# Altium PCB PCB1.PcbDoc (part 2 of 4)
Units mil, origin at the board's own origin, x right, y up, seen from the top; angles counter-clockwise.
Board outline 3912 x 3804 mil, 4 copper layers (Top Layer, Layer 2, Layer 3, Bottom Layer), stack 23.756 mil thick; 248 components, 329 nets, 1182 pads, 457 vias.
Unrouted connection lines stored in the file: 4.
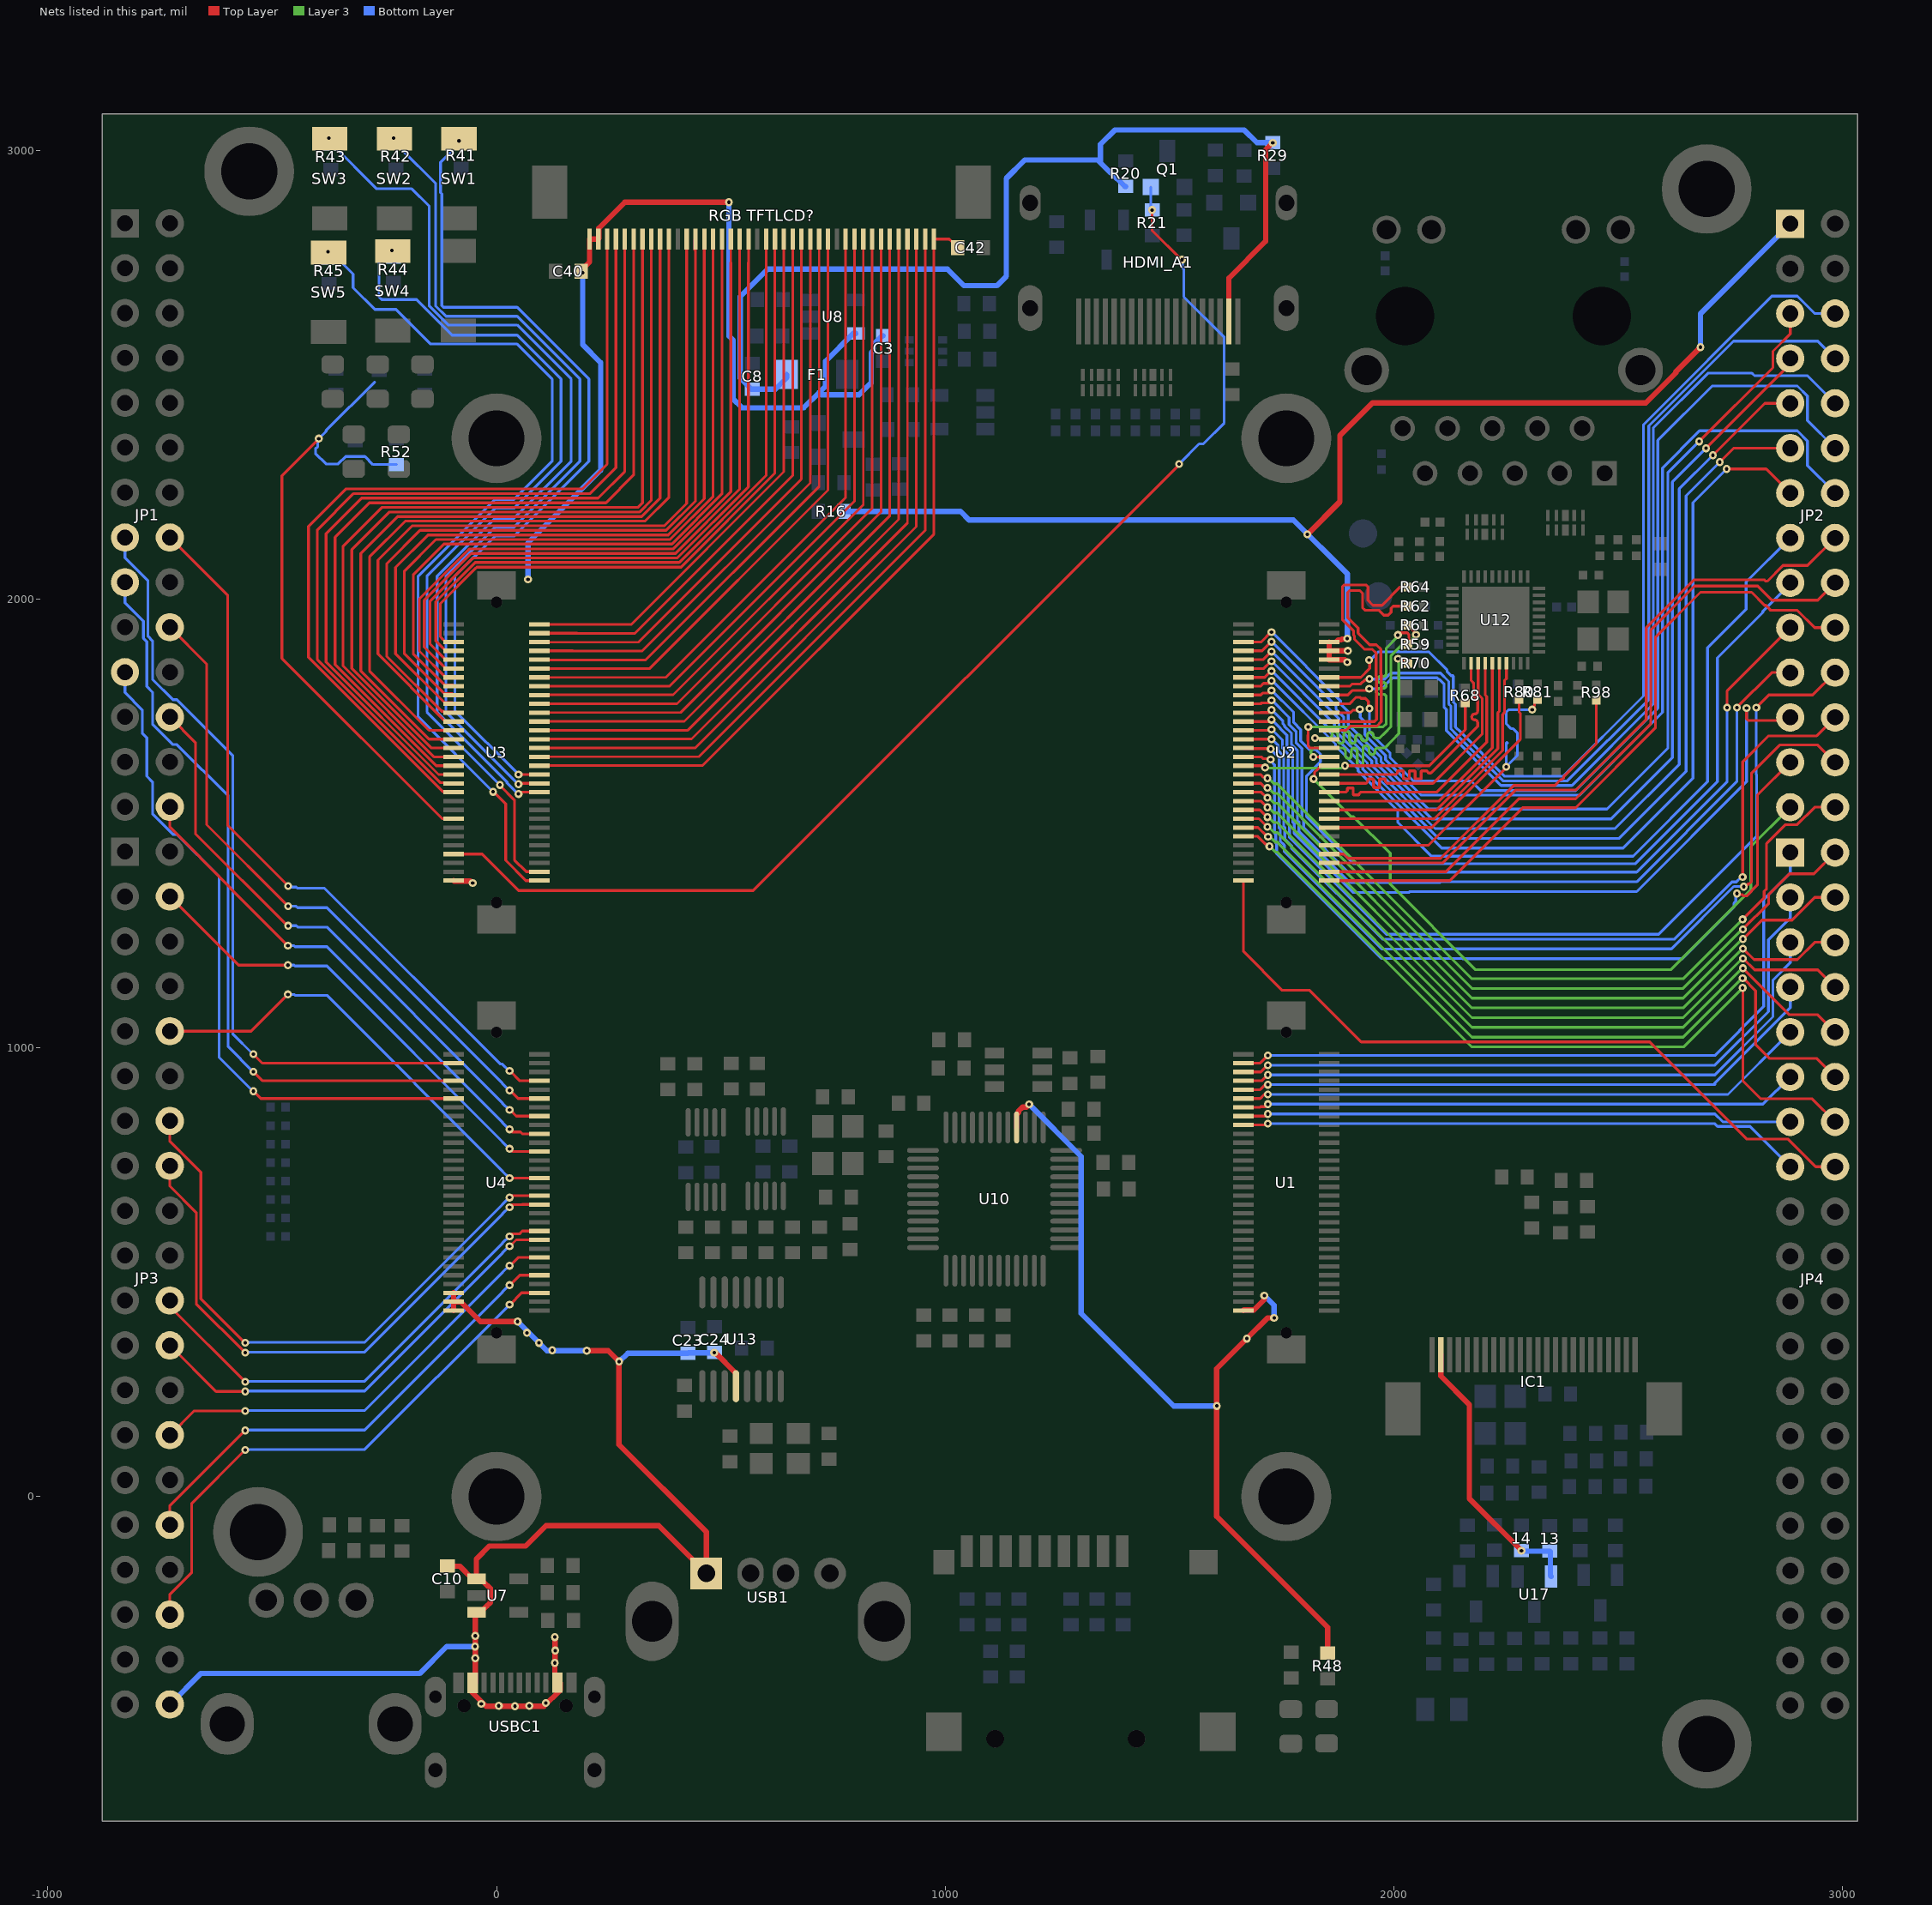
[diagram p4: the nets of this part, all layers, seen from the top]

## Via types
v1: diameter 17.7, hole 7.9, Top Layer to Bottom Layer, tented both sides, 445 vias
v2: diameter 17.7, hole 7.9, Top Layer to Bottom Layer, 12 vias

## Nets (pads, with @x,y where several pads share a name; then routed paths per layer and width w, separated by ;. In a path a pad name is that pad's centre, name@x,y a point inside that pad or via, vN(x,y) a via of type N, cw(c..) or ccw(c..) an arc to the next point about the centre after c; other vN are vias at no path point) (continued)
+5: "RGB TFTLCD?.1" "RGB TFTLCD?.2" C3.2 C10.2 C23.2 C24.2 C40.2 JP2.1 JP3.40 R16.2 R48.2 U1.1 U2.52 U2.54 U2.56 U3.1 U4.1 U4.3 U4.5 U7.1 U7.3 U8.5 U10.40 U13.12 USB1.1 USBC1.A4 USBC1.A9 USBC1.B4 USBC1.B9 | length 10707.7
  Top Layer w12: C10.2@-109.31,-154.78 -108.97,-155.11 -81.6,-155.11 -53.65,-183.06 U7.1@-44.8,-183.06 ; U4.1@-95.47,414.56 U4.3@-95.47,434.24 ; U4.5@-95.47,453.93 U4.3@-95.47,434.24 ; U3.1@-95.47,1372.56 -94.39,1371.48 -58.48,1371.48 -54,1367 v1(-53,1367) ; USBC1.A4@-59.18,-414.92 -59.18,-431.46 -23.64,-467 105.9,-467 141.6,-431.3 USBC1.A9@141.6,-414.76 ; USBC1.B9@-47.37,-414.92 v1(-47.37,-360) v1(-47.37,-310.22) -47.37,-260.44 U7.3@-44.8,-257.87 -35.94,-257.87 -21.64,-243.57 -21.28,-243.57 -14.13,-236.42 -14.13,-204.51 -19.98,-198.65 -20.35,-198.65 -35.94,-183.06 U7.1@-44.8,-183.06 ; v1(47,390) -35.67,390 -79.91,434.24 U4.3@-95.47,434.24 ; USBC1.B4@129.79,-414.76 v1(129.79,-370.48) 130.4,-369.88 130.4,-343.6 v1(131,-343) 130.5,-342.5 130.5,-313.5 v1(130,-313) ; v1(192,2726.54) C40.2@188.54,2730 188.54,2731.97 207.13,2750.56 207.13,2802 226.82,2802 227.9,2803.08 227.9,2826.08 285.82,2884 v1(518,2884) ; v1(201,325) 249,325 v1(273,301) 273,116 467.57,-78.57 USB1.1@467.57,-171 361.57,-65 110.06,-65 65.06,-110 -16,-110 -44.8,-138.8 U7.1@-44.8,-183.06 ; v1(485.03,320.96) 487.29,320.96 533.53,274.72 U13.12@533.53,246 ; U10.40@1159.09,822.57 1159.09,851.51 1163.27,855.69 1163.27,858.91 1172.36,868 1181,868 v1(1187,874) ; U1.1@1664.53,414.56 1665.61,415.64 1687.63,415.64 1711,439.01 v1(1711,448) ; v1(1733,398) 1718,398 v1(1672,352) 1605,285 v1(1605,202) 1605,-44 1852,-291 R48.2@1852,-348.91 ; v1(1807,2144) 1879.5,2216.5 1879.5,2364.5 1952,2437 2561.34,2437 2628.09,2503.74 2628.09,2506.09 v1(2683,2561) ; U2.56@1855.47,1904.05 U2.54@1855.47,1884.37 ; U2.56@1872.11,1905.13 1875.79,1908.82 1882.25,1908.82 1884.31,1910.87 1894.87,1910.87 v1(1895.97,1911.97) ; v1(1896,1859) 1890.32,1864.68 U2.52@1855.47,1864.68 U2.54@1855.47,1884.37 ; v1(1897.15,1884.37) U2.54@1855.47,1884.37
  Bottom Layer w12: JP3.40@-728,-463 -659,-394 -171,-394 -111,-334 v1(-48,-334) ; v1(47,390) 112,325 v1(201,325) ; v1(70.18,2043.82) 70,2044 70,2125 232,2287 232,2527 192,2567 v1(192,2726.54) ; v1(273,301) 274.06,301 292.52,319.46 C23.2@426.53,319.46 427.53,320.46 484.53,320.46 v1(485.03,320.96) C24.2@485.53,321.46 ; v1(518,2884) 518,2586 527.14,2576.86 527.14,2445.86 547,2426 684.87,2426 718.94,2460.07 ; R16.2@774.54,2195 1034,2195 1053,2176 1776,2176 1896,2056 v1(1895.97,1911.97) ; U8.5@800.77,2591.6 794.87,2591.6 733,2529.73 733,2474.13 718.94,2460.07 ; C3.2@861.87,2586.54 859.91,2586.54 840.62,2567.26 840.62,2553.84 834.87,2548.09 834.87,2481.86 808.02,2455 724.02,2455 718.94,2460.07 ; v1(1187,874) 1303,758 1303,408 1509,202 v1(1605,202) ; v1(1711,448) 1732.61,426.39 1732.61,398.39 v1(1733,398) ; v1(2683,2561) 2683,2635.93 JP2.1@2883.07,2836
  other v1: 41.13,-467 5,-466 73,-466 -34,-462 110,-460 124,326 94.49,342.51 68,365
+5_hdmi: C8.2 F1.2 HDMI_A1.18 R20.1 R29.1 | length 2369.8
  Top Layer w12: HDMI_A1.18@1632.11,2618 1632.11,2715.11 1714,2797 1714,3000.54 v1(1730,3016.54)
  Bottom Layer w12: F1.2@646.37,2500 646.37,2492.5 621.33,2467.46 567.91,2467.46 543.14,2492.22 543.14,2673.99 604.15,2735 1005,2735 1042,2698 1115,2698 1136,2719 1136,2937 1177,2978 1340,2978 1346,2972 ; R20.1@1402,2919 1400.03,2919 1369.15,2949.88 1368.12,2949.88 1346,2972 ; v1(1730,3016.54) 1694.64,3016.54 1666.18,3045 1378,3045 1346,3013 1346,2978 1346,2972
AF-2.8V_ov: 13.2 14.2 IC1.23 U17.2 | length 634.1
  Top Layer w12: IC1.23@2104.31,316 2104.4,315.91 2104.4,268.6 2168,205 2168,-4.54 v1(2284,-120.54)
  Bottom Layer w12: v1(2284,-120.54) 2283,-121.54 13.2@2347,-121.54 2348.5,-123.04 2348.5,-176.5 U17.2@2350,-178
B14_IO0: JP2.21 U2.39 | length 1793.4
  Top Layer w6.16: U2.39@1664.54,1746.57 1702.95,1746.57 1703.22,1746.85 1721.23,1746.85 v1(1727,1752.62) ; v1(2764.1,1758) 2842.1,1836 JP2.21@2883.07,1836
  Bottom Layer w6.16: v1(1727,1752.62) 1727.83,1752.62 1752.47,1727.98 1752.47,1721.88 1756.1,1718.25 1756.1,1716.16 1771.68,1700.58 1771.68,1675.58 1784.68,1662.58 1784.68,1506.58 1788,1503.26 1788,1482 1902,1368 2103,1368 ; 2103,1369.74 2540.84,1369.74 2764.1,1593 v1(2764.1,1758)
B14_IO25: JP4.16 U2.1 | length 1675.2
  Top Layer w6.16: U2.1@1664.53,1372.56 1664.53,1214.47 1751,1128 1812,1128 1927,1013 2570,1013 2786.58,796.42 2878.58,796.42 2940,735 JP4.16@2983.07,735
B14_N_L3: JP2.19 U2.41 | length 1849.6
  Top Layer w6.16: U2.41@1664.54,1766.26 1702.95,1766.26 1705.24,1768.55 1721.23,1768.55 v1(1727,1774.32) ; v1(2742.4,1758) 2742.4,1795.33 JP2.19@2883.07,1936
  Bottom Layer w6.16: v1(1727,1774.32) 1727.83,1774.32 1766.26,1735.88 1766.26,1720.37 1781.84,1704.79 1781.84,1679.79 1794.84,1666.79 1794.84,1510.79 1798.55,1507.08 1798.55,1490.45 1898,1391 2087,1391 ; 2087,1391.44 2540.84,1391.44 2742.4,1593 v1(2742.4,1758)
B14_N_L4: JP2.15 U2.45 | length 1910.4
  Top Layer w6.16: U2.45@1664.54,1805.63 1702.95,1805.63 1709.27,1811.95 1721.23,1811.95 v1(1727,1817.72)
  Bottom Layer w6.16: v1(1727,1817.72) 1728.81,1817.72 1869.84,1676.69 1869.84,1672.14 1920.26,1621.73 1920.26,1616.67 2008.5,1528.42 2008.5,1502 2083.5,1427 2533,1427 2699,1593 2699,1758 2699,1891 2785,1977 2785,2037.93 JP2.15@2883.07,2136
B14_N_L5: R62.1 U2.36 | length 643.2
  Top Layer w6.16: U2.36@1855.47,1707.2 1893.43,1707.2 1902.96,1716.73 1961.6,1716.73 1971.47,1726.6 1971.47,1832.05 1970.54,1832.99 1970.54,1888.09 1960.63,1898 1946,1898 1920,1924 1920,1935 1897,1958 1897,2015 1900.68,2018.68 1924.32,2018.68 1930,2013 1930,1980.5 1935.5,1975 1966,1975 1977.04,1963.96 1986.96,1963.96 1993.5,1970.5 1993.5,1979.5 1998,1984 R62.1@2031.54,1984
B14_N_L6: R70.1 U2.30 | length 590
  Top Layer w6.16: v2(1820.15,1648.15) U2.30@1855.47,1648.15 ; v2(2008.84,1866.61) 2011.97,1866.61 2015.31,1863.26 2027.74,1863.26 R70.1@2032,1859
  Layer 3 w6.16: v2(1820.15,1648.15) 1820.15,1651.27 1815,1656.41 1815,1662 1821,1668 1869,1668 1885.24,1668 cw(c1885.24,1661.42) 1891.82,1661.42 1891.82,1651.01 ccw(c1898.4,1651.01) 1904.98,1651.01 1904.98,1661.42 cw(c1911.56,1661.42) 1918.14,1661.42 1918.14,1634.58 ccw(c1924.72,1634.58) 1931.3,1634.58 1931.3,1666.68 cw(c1937.88,1666.68) 1944.46,1666.68 1944.46,1659.88 ccw(c1951.04,1659.88) 1957.62,1659.88 1957.62,1661.42 cw(c1964.2,1661.42) 1964.2,1668 1979,1668 1997,1686 2011,1700 2011,1864.45 v2(2008.84,1866.61)
B14_N_L7: JP2.23 U2.37 | length 1792.9
  Top Layer w6.16: U2.37@1664.54,1726.89 1722.97,1726.89 v1(1727,1730.92) ; v1(2785.8,1757.17) 2785.8,1732.81 2789.41,1729.2 2876.27,1729.2 JP2.23@2883.07,1736
  Bottom Layer w6.16: v1(1727,1730.92) 1727.83,1730.92 1745.94,1712.8 1745.94,1711.95 1761.52,1696.37 1761.52,1671.37 1774.52,1658.37 1774.52,1502.37 1777.84,1499.05 1777.84,1477.79 1909.63,1346 2034,1346 ; 2034,1348.04 2540.84,1348.04 2785.8,1593 v1(2785.8,1757.17)
B14_N_L8: R61.1 U2.34 | length 555.5
  Top Layer w6.16: R61.1@2035,1941 2035,1937.78 2046.89,1925.89 2046.89,1922.38 v2(2049.1,1920.17)
  Layer 3 w6.16: v2(1824,1690) 1852,1690 1855.08,1690 ccw(c1855.08,1696.58) 1861.66,1696.58 1861.66,1698.26 cw(c1868.24,1698.26) 1874.82,1698.26 1874.82,1684.74 ccw(c1881.4,1684.74) 1887.98,1684.74 1887.98,1698.26 cw(c1894.56,1698.26) 1901.14,1698.26 1901.14,1684.74 ccw(c1907.72,1684.74) 1914.3,1684.74 1914.3,1690.76 cw(c1920.88,1690.76) 1927.46,1690.76 1927.46,1690 ccw(c1934.04,1690) 1940.62,1690 1940.62,1696.58 cw(c1947.2,1696.58) 1953.78,1696.58 ccw(c1960.36,1696.58) 1960.36,1690 1968,1690 1980,1702 1992.91,1714.91 1992.91,1873.21 2015.29,1895.59 2024.51,1895.59 v2(2049.1,1920.17)
B14_N_L9: U2.16 U12.37 | length 647.2
  Top Layer w6.16: U2.16@1855.47,1510.35 1949.17,1510.35 2089.91,1510.35 2107.82,1528.26 2241.9,1662.34 2241.9,1742.34 2246.26,1746.7 2246.26,1818.16 2250.62,1822.52 U12.37@2250.62,1856.54
B14_N_L10: R81.1 U2.10 | length 756.5
  Top Layer w6.16: U2.10@1855.47,1451.3 1885,1451.3 1936.16,1451.3 2077.3,1451.3 2250,1624 v1(2250,1626) ; v1(2308,1753.44) 2308,1756.56 2313.24,1761.8 2313.24,1769.5 R81.1@2320,1776.27
  Bottom Layer w6.16: 2252.4,1679.07 2251.58,1679.89 2250,1678.31 v1(2250,1626) 2274.93,1650.93 2274.93,1701.6 2265.6,1710.93 2261.57,1710.93 2249.98,1722.51 2249.98,1747.41 2255.95,1753.37 2307.93,1753.37 v1(2308,1753.44)
B14_N_L11: JP2.26 U2.31 | length 1966
  Top Layer w6.16: U2.31@1664.53,1667.83 1665.64,1666.72 1724.16,1666.72 v1(1725.27,1665.61) ; v1(2779.4,1358.93) 2782.53,1358.93 2788.33,1364.73 2791.07,1364.73 2797,1370.66 2797,1612 2859.58,1674.58 2944.49,1674.58 JP2.26@2983.07,1636
  Bottom Layer w6.16: v1(1725.27,1665.61) 1725.27,1664.52 1744.04,1645.75 1744.04,1489.75 1746.68,1487.11 1746.68,1460.58 1755.91,1451.35 1755.91,1437.09 1973,1220 2128,1220 ; 2128,1220.3 2618.24,1220.3 2757.46,1359.52 2778.82,1359.52 v1(2779.4,1358.93)
B14_N_L12: JP2.25 U2.29 | length 1836
  Top Layer w6.16: U2.29@1664.54,1648.15 1704.09,1648.15 1707.84,1644.4 1722.86,1644.4 v1(1725.07,1642.19) ; v1(2764.06,1343.59) 2766.27,1341.38 2775.98,1341.38 2779.07,1338.3 2785.66,1338.3 2810,1362.63 2810,1562.93 JP2.25@2883.07,1636
  Bottom Layer w6.16: v1(1725.07,1642.19) 1725.07,1639.43 1733.88,1630.63 1733.88,1478.59 1736.52,1475.95 1736.52,1456.37 1738.47,1454.42 1738.47,1432.53 1972,1199 2153,1199 ; 2153,1198.6 2642.23,1198.6 2757.79,1314.16 2757.79,1322.32 2761.85,1326.38 2761.85,1341.38 v1(2764.06,1343.59)
B14_N_L13: JP2.28 U2.25 | length 1733.5
  Top Layer w6.16: U2.25@1664.54,1608.78 1702.95,1608.78 1708.8,1602.92 1715.74,1602.92 v1(1717.95,1600.72) ; v1(2777,1286.2) 2825,1334.2 2825,1348.89 2830.32,1354.21 2830.32,1455.25 2872.34,1497.28 2898.9,1497.28 2937.63,1536 JP2.28@2983.07,1536
  Layer 3 w6.16: v1(1717.95,1600.72) 1720.36,1600.72 1732.69,1588.39 1740.15,1588.39 1742.93,1585.61 1742.93,1584.79 2173.82,1153.9 2644.7,1153.9 v1(2777,1286.2)
B14_N_L14: U2.24 U12.33 | length 598.7
  Top Layer w6.16: U2.24@1855.47,1589.09 1934.75,1589.09 1937.83,1589.09 1941.44,1592.7 1941.44,1597.96 1942.1,1598.62 1953.95,1598.62 1954.6,1597.96 1954.6,1580.22 1955.26,1579.57 1967.11,1579.57 1967.76,1580.22 1967.76,1597.96 1968.42,1598.62 1980.27,1598.62 1980.92,1597.96 1980.92,1592.7 1984.53,1589.09 2020.73,1589.09 2086.93,1589.09 2196.64,1698.8 2196.64,1778.07 2187.63,1787.08 U12.33@2187.63,1856.54
B14_N_L15: JP4.9 U1.49 | length 1279.8
  Top Layer w6.16: U1.49@1664.54,887 1701.91,887 1710.97,896.06 v1(1719,896.06)
  Bottom Layer w6.16: v1(1719,896.06) 2744.13,896.06 JP4.9@2883.07,1035
B14_N_L16: JP4.6 U2.19 | length 1590.6
  Top Layer w6.16: U2.19@1664.53,1549.72 1703.01,1549.72 1717.12,1535.62 v1(1717.95,1535.62) ; v1(2777.41,1220.69) 2778.24,1220.69 2802.5,1196.42 2899.05,1196.42 2937.63,1235 JP4.6@2983.07,1235
  Layer 3 w6.16: v1(1717.95,1535.62) 1720.36,1535.62 1732.69,1523.29 1740.15,1523.29 1742.93,1520.51 1742.93,1519.69 2173.82,1088.8 2644.7,1088.8 2776.59,1220.69 v1(2777.41,1220.69)
B14_N_L17: JP4.15 U1.43 | length 1259.5
  Top Layer w6.16: U1.43@1664.54,827.94 1715.98,827.94 v1(1719,830.96)
  Bottom Layer w6.16: v1(1719,830.96) 2715,830.96 2721.12,824.84 2793.23,824.84 JP4.15@2883.07,735
B14_N_L18: U2.20 U12.35 | length 601
  Top Layer w6.16: U2.20@1855.47,1549.72 1887.32,1549.72 2100.54,1549.72 2125.73,1574.91 2128.41,1577.59 2219.13,1668.3 2219.13,1695.65 2219.13,1759.24 2219.13,1829 U12.35@2219.13,1856.54
B14_N_L19: JP4.14 U2.11 | length 1811.8
  Top Layer w6.16: U2.11@1664.53,1470.98 1696.44,1470.98 1712.83,1454.59 1713.6,1454.59 1719.38,1448.8 v1(1722.51,1448.8) ; v1(2777,1133.47) 2777.41,1133.06 2777.41,926.59 2817.77,886.23 2931.84,886.23 JP4.14@2983.07,835
  Layer 3 w6.16: v1(1722.51,1448.8) 1722.66,1448.8 1735.38,1436.08 1739.74,1436.08 2173.82,1002 2645.53,1002 v1(2777,1133.47)
B14_N_L20: U2.26 U12.32 | length 610
  Top Layer w6.16: U2.26@1855.47,1608.78 2001.04,1608.78 2004.12,1608.78 2007.73,1612.38 2007.73,1616.13 2008.39,1616.79 2020.23,1616.79 2020.89,1616.13 2020.89,1599.91 2021.55,1599.25 2033.39,1599.25 2034.05,1599.91 2034.05,1616.13 2034.71,1616.79 2046.55,1616.79 2047.21,1616.13 2047.21,1599.91 2047.87,1599.25 2059.71,1599.25 2060.37,1599.91 2060.37,1616.13 2061.03,1616.79 2072.87,1616.79 2073.53,1616.13 2073.53,1615.85 2077.14,1612.24 2082.24,1612.24 2093,1623 2186.48,1716.48 2186.48,1721 2186.48,1724.08 ccw(c2179.9,1724.08) 2179.9,1730.66 cw(c2179.9,1737.24) 2179.9,1743.82 ccw(c2179.9,1750.4) 2186.48,1750.4 2186.48,1764 2186.48,1773.86 2177.47,1782.87 2177.47,1812.96 2171.88,1818.55 U12.32@2171.88,1856.54
B14_N_L21: JP2.18 U2.4 | length 1543.1
  Top Layer w6.16: U2.4@1855.47,1392.24 2116.08,1392.24 2278.52,1554.68 2405,1554.68 2572.32,1722.01 2572.32,1931.58 2669.66,2028.92 2810.92,2028.92 2842.41,1997.42 2944.49,1997.42 JP2.18@2983.07,2036
B14_N_L22: JP4.8 U2.17 | length 1591.9
  Top Layer w6.16: U2.17@1664.53,1530.04 1701,1530.04 1717.12,1513.92 v1(1717.95,1513.92) ; v1(2777.41,1198.99) 2778.24,1198.99 2803.65,1173.58 2944.49,1173.58 JP4.8@2983.07,1135
  Layer 3 w6.16: v1(1717.95,1513.92) 1720.36,1513.92 1732.69,1501.59 1740.15,1501.59 1742.93,1498.81 1742.93,1497.99 2173.82,1067.1 2644.7,1067.1 2776.59,1198.99 v1(2777.41,1198.99)
B14_N_L23: JP4.5 U1.53 | length 1421
  Top Layer w6.16: U1.53@1664.54,926.37 1705.08,926.37 1718.17,939.46 v1(1719,939.46)
  Bottom Layer w6.16: v1(1719,939.46) 2715,939.46 2844.49,1068.96 2844.49,1150.98 2883.07,1189.55 JP4.5@2883.07,1235
B14_N_L24: JP4.1 U1.57 | length 1579.8
  Top Layer w6.16: U1.57@1664.54,965.74 1701.91,965.74 1701.91,966.6 1718.17,982.86 v1(1719,982.86)
  Bottom Layer w6.16: v1(1719,982.86) 2715,982.86 2824.17,1092.04 2824.17,1330.66 2883.07,1389.55 JP4.1@2883.07,1435
B14_P_L3: JP2.17 U2.43 | length 1960.1
  Top Layer w6.16: U2.43@1664.54,1785.94 1702.95,1785.94 1707.25,1790.25 1721.23,1790.25 v1(1727,1796.02)
  Bottom Layer w6.16: v1(1727,1796.02) 1727.83,1796.02 1776.42,1747.42 1776.42,1724.58 1792,1709 1792,1684 1811.92,1664.08 1826.74,1664.08 1836.08,1654.74 1836.08,1636.69 1805,1605.61 1805,1515 1910,1410 2537.7,1410 2720.7,1593 2720.7,1868.7 2822,1970 2822,1972.46 2883.07,2033.54 JP2.17@2883.07,2036
B14_P_L4: JP2.13 U2.47 | length 2128.8
  Top Layer w6.16: U2.47@1664.54,1825.31 1712.07,1825.31 1726.17,1839.42 v1(1727,1839.42) ; v1(2741.38,2289.62) 2829.45,2289.62 JP2.13@2883.07,2236
  Bottom Layer w6.16: v1(1727,1839.42) 1727.83,1839.42 1857.36,1709.88 1857.36,1703.55 1930.42,1630.49 1930.42,1620.87 2106.29,1445 2510.75,1445 2666.38,1600.62 2666.38,2214.62 v1(2741.38,2289.62)
B14_P_L5: R64.1 U2.38 | length 646.9
  Top Layer w6.16: U2.38@1855.47,1726.89 1956.77,1726.89 1961.31,1731.43 1961.31,1827.84 1960.38,1828.78 1960.38,1879.34 1951.88,1887.84 1934.16,1887.84 1911.9,1910.1 1911.9,1917.74 1909.84,1919.79 1909.84,1929.16 1885,1954 1885,2027.39 1888.61,2031 1938.39,2031 1942,2027.39 1942,1997 1953,1986 1973.19,1986 2013.69,2026.5 R64.1@2031.54,2026.5
B14_P_L7: JP2.22 U2.35 | length 2036.2
  Top Layer w6.16: U2.35@1664.54,1707.2 1724.98,1707.2 v1(1727,1709.22) ; v1(2807.5,1758) 2835.5,1786 2933.07,1786 JP2.22@2983.07,1836
  Bottom Layer w6.16: v1(1727,1709.22) 1727.83,1709.22 1751.36,1685.68 1751.36,1667.17 1764.36,1654.17 1764.36,1498.17 1767,1495.53 1767,1469 1983,1253 2590,1253 2808,1471 2808,1609 ; 2807.5,1609 v1(2807.5,1758)
B14_P_L8: R59.1 U2.32 | length 588.4
  Top Layer w6.16: v2(1809,1715) 1809,1697.53 1808.07,1696.6 1808.07,1683.4 1809,1682.47 1809,1672 1813.17,1667.83 U2.32@1855.47,1667.83 ; v2@2009.9,1925 2018.08,1925 2018.51,1924.58 2029.56,1924.58 2033.17,1920.97 2033.17,1900.63 R59.1@2031.54,1899
  Layer 3 w6.16: v2(1809,1715) 1976,1715 1982.75,1721.75 1982.75,1778 1982.75,1781.08 ccw(c1976.17,1781.08) 1976.17,1787.66 1967.36,1787.66 cw(c1967.36,1794.24) 1967.36,1800.82 1976.17,1800.82 ccw(c1976.17,1807.4) 1976.17,1813.98 1968.89,1813.98 cw(c1968.89,1820.56) 1968.89,1827.14 1976.17,1827.14 ccw(c1976.17,1833.72) 1982.75,1833.72 1982.75,1871 1982.75,1890.75 2008.69,1916.69 v2(2008.69,1919.69)
  Bottom Layer w6.16: v2@2008.69,1918.31 v2(2008.69,1919.69)
B14_P_L9: R80.1 U2.14 | length 597.6
  Top Layer w6.16: U2.14@1855.47,1490.67 2084.6,1490.67 2281.84,1687.92 2281.84,1744.59 2279,1747.43 R80.1@2279,1776.27
B14_P_L10: R98.1 U2.8 | length 804.4
  Top Layer w6.16: U2.8@1855.47,1431.61 1888.11,1431.61 1897.73,1422 2104,1422 2266.53,1584.53 2358.53,1584.53 2371.49,1597.49 2374.28,1597.49 2378.42,1601.63 2378.42,1604.42 2450.87,1676.87 R98.1@2450.87,1774.69
B14_P_L11: JP2.24 U2.33 | length 1974.7
  Top Layer w6.16: U2.33@1664.54,1687.52 v1(1727,1687.52) ; v1(2776.98,1380.5) 2776.98,1636.98 2835,1695 2942.07,1695 JP2.24@2983.07,1736
  Bottom Layer w6.16: v1(1727,1687.52) 1727.83,1687.52 1741.2,1674.14 1741.2,1662.96 1754.2,1649.96 1754.2,1493.96 1756.84,1491.32 1756.84,1464.79 1771.81,1449.82 1771.81,1444.19 1974,1242 2625.57,1242 2753.25,1369.68 2763.04,1369.68 2773.86,1380.5 v1(2776.98,1380.5)
B14_P_L12: R68.1 U2.27 | length 592.5
  Top Layer w6.16: U2.27@1664.54,1628.46 1705.81,1628.46 1709.86,1624.41 v1(1712.62,1624.41) ; v2(1890.96,1628.5) 2078.5,1628.5 2159,1709 R68.1@2159,1768.27
  Layer 3 w6.16: v1(1712.62,1624.41) 1714.11,1622.93 1882.27,1622.93 1885.63,1626.29 v2@1892.71,1626.29
B14_P_L13: JP4.2 U2.23 | length 1645.3
  Top Layer w6.16: U2.23@1664.54,1589.09 1702.95,1589.09 1710.82,1581.22 1715.74,1581.22 v1(1717.95,1579.02) ; v1(2777.41,1264.09) 2835.16,1321.83 2835.16,1341.64 2881.07,1387.55 2935.62,1387.55 JP4.2@2983.07,1435
  Layer 3 w6.16: v1(1717.95,1579.02) 1720.36,1579.02 1732.69,1566.69 1740.15,1566.69 1742.93,1563.91 1742.93,1563.09 2173.82,1132.2 2644.7,1132.2 2776.59,1264.09 v1(2777.41,1264.09)
B14_P_L14: U2.22 U12.34 | length 600
  Top Layer w6.16: U2.22@1855.47,1569.41 1889.34,1569.41 1892.42,1569.41 1896.03,1573.01 1896.03,1578.27 1896.69,1578.93 1908.53,1578.93 1909.19,1578.27 1909.19,1563.92 1909.85,1563.27 1921.69,1563.27 1922.35,1563.92 1922.35,1565.8 1925.96,1569.41 1954.44,1569.41 2095.08,1569.41 2127.07,1601.39 2200.34,1674.66 2206.8,1681.12 2206.8,1782.28 2203.38,1785.7 U12.34@2203.38,1856.54
B14_P_L15: JP4.11 U1.47 | length 1246.6
  Top Layer w6.16: U1.47@1664.54,867.31 1701.91,867.31 1703.19,868.59 1713.23,868.59 v1(1719,874.36)
  Bottom Layer w6.16: v1(1719,874.36) 2822.43,874.36 JP4.11@2883.07,935
B14_P_L16: JP4.4 U2.21 | length 1602.1
  Top Layer w6.16: U2.21@1664.53,1569.4 1704.45,1569.4 1716.54,1557.32 v1(1717.95,1557.32) ; v1(2777.41,1242.39) 2778.24,1242.39 2820.22,1284.36 2886.99,1284.36 2937.63,1335 JP4.4@2983.07,1335
  Layer 3 w6.16: v1(1717.95,1557.32) 1720.36,1557.32 1732.69,1544.99 1740.15,1544.99 1742.93,1542.21 1742.93,1541.39 2173.82,1110.5 2644.7,1110.5 2776.59,1242.39 v1(2777.41,1242.39)
B14_P_L17: JP4.13 U1.45 | length 1227.9
  Top Layer w6.16: U1.45@1664.54,847.63 1713.96,847.63 v1(1719,852.66)
  Bottom Layer w6.16: v1(1719,852.66) 2715,852.66 2732.66,835 JP4.13@2883.07,835
B14_P_L18: U2.18 U12.36 | length 624.1
  Top Layer w6.16: U2.18@1855.47,1530.04 1881.23,1530.04 2095.23,1530.04 2125.73,1560.54 2231.74,1666.55 2231.74,1746.55 2234.87,1749.68 U12.36@2234.87,1856.54
B14_P_L19: JP4.12 U2.13 | length 1728.4
  Top Layer w6.16: U2.13@1664.53,1490.67 1696.97,1490.67 1717.12,1470.52 v1(1719.43,1470.52) ; v1(2777,1155.17) 2777.83,1155.17 2806,1127 2806,1007 2836.56,976.44 2941.63,976.44 JP4.12@2983.07,935
  Layer 3 w6.16: v1(1719.43,1470.52) 1722.55,1470.52 1728.34,1464.73 1729.26,1464.73 1735.8,1458.19 1740.15,1458.19 1742.93,1455.41 1742.93,1454.59 2173.82,1023.7 2644.7,1023.7 2776.17,1155.17 v1(2777,1155.17)
B14_P_L20: JP2.27 U2.28 | length 1533.2
  Top Layer w6.16: v2(1820.93,1599.02) 1823.14,1601.22 1823.14,1614.01 1829.9,1620.78 1830.07,1620.78 1837.76,1628.46 U2.28@1855.47,1628.46
  Layer 3 w6.16: v2(1820.93,1599.02) 1904.83,1515.12 1909.88,1515.12 1991.57,1433.43 1991.57,1364.43 2182,1174 2617,1174 2795.33,1352.33 2795.33,1448.26 JP2.27@2879,1531.93
B14_P_L21: JP2.16 U2.6 | length 1549.7
  Top Layer w6.16: U2.6@1855.47,1411.93 1893.43,1411.93 1893.52,1411.84 2108.21,1411.84 2270.74,1574.37 2405,1574.37 2562.16,1731.53 2562.16,1935.79 2669.21,2042.84 2824.84,2042.84 2827.84,2039.84 2832.35,2039.84 2867.09,2074.58 2921.65,2074.58 JP2.16@2983.07,2136
B14_P_L22: JP4.10 U2.15 | length 1625.2
  Top Layer w6.16: U2.15@1664.53,1510.35 1698.98,1510.35 1717.12,1492.22 v1(1717.95,1492.22) ; v1(2777.41,1177.29) 2881.12,1073.58 2944.49,1073.58 JP4.10@2983.07,1035
  Layer 3 w6.16: v1(1717.95,1492.22) 1720.36,1492.22 1732.69,1479.89 1740.15,1479.89 1742.93,1477.11 1742.93,1476.29 2173.82,1045.4 2644.7,1045.4 2776.59,1177.29 v1(2777.41,1177.29)
B14_P_L23: JP4.7 U1.51 | length 1341.9
  Top Layer w6.16: U1.51@1664.54,906.68 1701.91,906.68 1712.99,917.76 v1(1719,917.76)
  Bottom Layer w6.16: v1(1719,917.76) 2715,917.76 2715,921.48 2883.07,1089.55 JP4.7@2883.07,1135
B14_P_L24: JP4.3 U1.55 | length 1500.2
  Top Layer w6.16: U1.55@1664.54,946.05 1703.06,946.05 1718.17,961.16 v1(1719,961.16)
  Bottom Layer w6.16: v1(1719,961.16) 2715,961.16 2834.33,1080.5 2834.33,1240.82 2883.07,1289.55 JP4.3@2883.07,1335
B15_IO0: "RGB TFTLCD?.10" U3.35 | length 1793.8
  Top Layer w6.16: U3.35@-95.46,1707.2 -150.2,1707.2 -283,1840 -283,2093.48 -202.96,2173.52 331.04,2173.52 384.3,2226.78 384.3,2802
B15_IO25: JP2.20 U2.2 | length 1545.9
  Top Layer w6.16: U2.2@1855.47,1372.56 2124.24,1372.56 2286.68,1535 2405,1535 2582.48,1712.48 2582.48,1914.48 2683,2015 2797,2015 2826.07,1985.93 2828.6,1985.93 2837.93,1976.6 2837.93,1974.58 2899.05,1974.58 2937.63,1936 JP2.20@2983.07,1936
B15_N_L1: "RGB TFTLCD?.3" U3.21 | length 1964.5
  Top Layer w6.16: U3.21@-95.47,1569.4 -97.31,1571.25 -120.25,1571.25 -419.05,1870.06 -419.05,2161.94 -336,2245 191,2245 246.5,2300.5 246.5,2802
B15_N_L2: "RGB TFTLCD?.7" U3.29 | length 1892.8
  Top Layer w6.16: U3.29@-95.46,1648.15 -139.67,1648.15 -342.05,1850.53 -342.05,2117.94 -256,2204 315,2204 325.24,2214.24 325.24,2802
B15_N_L3: R42.1 SW2.2 U3.24 | length 1954.5
  Top Layer w6.16: v1(49,1587.3) 50.79,1589.09 U3.24@95.47,1589.09
  Bottom Layer w6.16: R42.1@-224,3014.54 -222.03,3014.54 -210.35,3002.86 -210.35,3000.89 -135.92,2926.46 -135.92,2653.23 -112.68,2630 46,2630 186,2490 186,2306.69 39,2159.69 -3.6,2159.69 -112.68,2050.6 -112.68,1748.16 48.17,1587.3 v1(49,1587.3)
  other v1: -229.3,3026.99
B15_N_L4: "RGB TFTLCD?.36" U3.36 | length 1610.5
  Top Layer w5.61: U3.36@104.91,1707.57 426.48,1707.57 896.11,2177.21 896.11,2802
B15_N_L5: "RGB TFTLCD?.6" U3.27 | length 1890.3
  Top Layer w6.16: U3.27@-95.46,1628.46 -134.36,1628.46 -360,1854.11 -360,2137.48 -283.24,2214.24 243.76,2214.24 305.56,2276.04 305.56,2802
B15_N_L6: "RGB TFTLCD?.34" U3.40 | length 1545.3
  Top Layer w5.61: U3.40@104.91,1746.95 410.17,1746.95 856.74,2193.51 856.74,2802
B15_N_L7: "RGB TFTLCD?.17" U3.47 | length 1565.5
  Top Layer w5.61: 522.09,2749.97 522.09,2802
  Top Layer w6.16: U3.47@-103,1825.31 -113.35,1825.31 -172,1883.96 -172,2000.34 -63.07,2109.26 -62.74,2109.26 -60.37,2111.63 394.47,2111.63 522.09,2239.25 522.09,2749.97
B15_N_L8: "RGB TFTLCD?.35" U3.38 | length 1577.9
  Top Layer w5.61: U3.38@104.91,1727.26 418.33,1727.26 876.43,2185.36 876.43,2802
B15_N_L9: "RGB TFTLCD?.22" U3.55 | length 1496.3
  Top Layer w5.61: 620,2749.97 620,2801.48 620.52,2802
  Top Layer w6.16: U3.55@-95.46,1904.05 -113.18,1904.05 -120.66,1911.53 -120.83,1911.53 -125.18,1915.88 -125.18,1989.68 -46.24,2068.62 -45.9,2068.62 -43.53,2070.99 411.31,2070.99 620,2279.68 620,2749.97
B15_N_L10: JP2.6 U2.48 | length 2158.3
  Top Layer w6.16: U2.48@1855.47,1825.31 1926.25,1825.31 1946,1845.06 1946,1862.3 v1(1944.45,1863.85)
  Bottom Layer w6.16: v1(1944.45,1863.85) 1946.85,1863.85 1965.08,1882.08 2001.79,1882.08 2004.73,1882.08 2005.19,1882.54 2012.19,1882.54 2012.65,1882.08 2078.08,1882.08 2118.07,1842.09 2118.07,1838.4 2127.4,1829.07 2131.09,1829.07 2132.32,1827.84 2132.32,1770.29 2137.08,1765.53 2137.08,1714.81 2148.32,1703.57 2247.04,1604.85 2377.11,1604.85 2556,1783.74 2556,2388.26 2842.31,2674.58 2899.05,2674.58 2937.63,2636 JP2.6@2983.07,2636
B15_N_L11: "RGB TFTLCD?.18" U3.49 | length 1552.4
  Top Layer w5.61: 541.78,2749.97 541.78,2802
  Top Layer w6.16: U3.49@-95.46,1845 -113.35,1845 -161,1892.65 -161,1996.97 -58.86,2099.1 -58.53,2099.1 -56.16,2101.47 398.68,2101.47 541.78,2244.57 541.78,2749.97
B15_N_L12: "RGB TFTLCD?.33" U3.42 | length 1512.7
  Top Layer w5.61: U3.42@104.91,1766.63 402.02,1766.63 837.06,2201.67 837.06,2802
B15_N_L13: "RGB TFTLCD?.25" U3.56 | length 1269.9
  Top Layer w5.61: U3.56@95.47,1904.05 95.89,1903.63 316.31,1903.63 679.57,2266.9 679.57,2802
B15_N_L14: "RGB TFTLCD?.23" U3.60 | length 1204.6
  Top Layer w5.61: U3.60@95.47,1943.42 95.89,1943 300,1943 640.2,2283.2 640.2,2802
B15_N_L15: JP2.5 U2.55 | length 2282.7
  Top Layer w6.16: U2.55@1664.54,1904.05 1704.01,1904.05 1726.17,1926.22 v1(1727,1926.22) ; v1(2680,2351) 2844.49,2515.49 2844.49,2551.98 2883.07,2590.55 JP2.5@2883.07,2636
  Bottom Layer w6.16: v1(1727,1926.22) 1727.83,1926.22 1881.08,1772.96 1881.08,1765.62 1898,1748.7 1898,1720.38 1971.06,1647.32 1971.06,1637.71 2076.97,1531.8 2474.8,1531.8 2610.18,1667.18 2610.18,2281.18 v1(2680,2351)
B15_N_L16: JP2.12 U2.42 | length 2077.3
  Top Layer w6.16: U2.42@1855.47,1766.26 1901.08,1766.26 1915.82,1781 1924.21,1781 1926.65,1778.57 1936.2,1778.57 1943.18,1771.59 1943.18,1758.32 v1(1945.38,1756.11)
  Bottom Layer w6.16: v1(1945.38,1756.11) 1945.38,1702.62 1991.38,1656.62 1991.38,1646.12 2043.03,1594.47 2171.9,1594.47 2193.21,1573.16 2404.47,1573.16 2588.16,1756.85 2588.16,2353.41 2709.33,2474.58 2899.05,2474.58 2921.65,2451.98 2921.65,2397.42 JP2.12@2983.07,2336
B15_N_L17: JP2.8 U2.46 | length 2077.5
  Top Layer w6.16: U2.46@1855.47,1805.63 1902.26,1805.63 1907.18,1810.55 1926.08,1810.55 1935.02,1819.49 1942.96,1819.49 v1(1945.16,1821.7)
  Bottom Layer w6.16: v1(1945.16,1821.7) 1945.39,1821.47 1979.45,1821.47 1992.66,1834.68 2103.69,1834.68 2122.16,1816.21 2122.16,1800.21 2122,1800.05 2122,1766.24 2126.92,1761.32 2126.92,1710.6 2138.16,1699.36 2242.83,1594.69 2386.63,1594.69 2567.84,1775.9 2567.84,2385.73 2756.68,2574.58 2944.49,2574.58 JP2.8@2983.07,2536
B15_N_L18: JP2.9 U2.51 | length 2159.5
  Top Layer w6.16: U2.51@1664.54,1864.68 1708.04,1864.68 1726.17,1882.82 v1(1727,1882.82) ; v1(2710.69,2320.31) 2826.38,2436 JP2.9@2883.07,2436
  Bottom Layer w6.16: v1(1727,1882.82) 1727.83,1882.82 1877.68,1732.96 1877.68,1711.96 1950.74,1638.91 1950.74,1629.29 2091.63,1488.4 2492.78,1488.4 2635.69,1631.31 2635.69,2245.31 v1(2710.69,2320.31)
B15_N_L19: "RGB TFTLCD?.39" U3.30 | length 1708.4
  Top Layer w5.61: U3.30@104.91,1648.52 450.94,1648.52 955.16,2152.74 955.16,2802
B15_N_L20: R44.1 SW4.2 U3.4 | length 1967.6
  Top Layer w6.16: v1(7.63,1585.63) 7.63,1584.21 40,1551.84 40,1418.49 66.24,1392.24 U3.4@95.47,1392.24
  Bottom Layer w6.16: R44.1@-230,2762.09 -258.3,2762.09 -261.91,2758.48 -261.91,2672.91 -256,2667 -178.42,2667 -99.11,2587.69 46,2587.69 143.68,2490 143.68,2306.69 39,2202 -3.6,2202 -155,2050.6 -155,1748.26 v1(7.63,1585.63)
  other v1: -232.96,2776.53
B15_N_L21: "RGB TFTLCD?.12" U3.37 | length 1770
  Top Layer w6.16: U3.37@-95.46,1726.89 -113.18,1726.89 -116.26,1729.97 -116.82,1729.97 -264.37,1877.52 -264.37,2086.63 -188,2163 374,2163 423.67,2212.67 423.67,2802
B15_N_L22: "RGB TFTLCD?.37" U3.34 | length 1643.1
  Top Layer w5.61: U3.34@104.91,1687.89 434.63,1687.89 915.8,2169.05 915.8,2802
B15_N_L23: "RGB TFTLCD?.13" U3.39 | length 1762.3
  Top Layer w5.61: -244.68,1872.2 -244.68,1914.68 ; 441.24,2777.93 441.24,2799.88 443.35,2802
  Top Layer w6.16: -244.68,1872.2 -122.14,1749.65 -118.63,1749.65 -117.39,1748.41 -97.31,1748.41 U3.39@-95.46,1746.57 ; -244.68,1914.68 -244.68,2078.48 -170.32,2152.84 329.68,2152.84 378.21,2152.84 443.35,2217.99 443.35,2802
B15_N_L24: "RGB TFTLCD?.30" U3.48 | length 1424.4
  Top Layer w5.61: U3.48@95.47,1825.31 377.18,1825.31 778,2226.13 778,2802
B15_P_L1: "RGB TFTLCD?.4" U3.23 | length 1939.7
  Top Layer w6.16: U3.23@-95.46,1589.09 -97.3,1590.93 -125.56,1590.93 -399.37,1864.74 -399.37,2153.79 -318.32,2234.84 208.68,2234.84 266.19,2292.35 266.19,2802
B15_P_L2: "RGB TFTLCD?.5" U3.25 | length 1915
  Top Layer w6.16: U3.25@-95.46,1608.78 -129.04,1608.78 -379.68,1859.42 -379.68,2145.64 -300.64,2224.68 226.36,2224.68 285.87,2284.2 285.87,2802
B15_P_L3: R41.1 SW1.2 U3.26 | length 1922.6
  Top Layer w6.16: v1(-83.57,3020.56) SW1.2@-83.57,3025.43 ; v1(49,1609) 49.22,1608.78 U3.26@95.47,1608.78
  Bottom Layer w6.16: R41.1@-82,3019 v1(-83.57,3020.56) -83.57,3013.95 -124.58,2972.93 -124.58,2905.26 -122,2902.68 -122,2653.68 -118,2649.69 46,2649.69 205.68,2490 205.68,2306.69 39,2140 -3.6,2140 -93,2050.6 -93,1751 v1(49,1609)
B15_P_L4: "RGB TFTLCD?.8" U3.31 | length 1860.2
  Top Layer w6.16: U3.31@-95.47,1667.83 -144.99,1667.83 -322.37,1845.21 -322.37,2109.79 -238.32,2193.84 319.21,2193.84 344.93,2219.56 344.93,2802
B15_P_L5: "RGB TFTLCD?.40" C42.1 U3.28 | length 1802.6
  Top Layer w5.61: U3.28@104.91,1628.84 459.09,1628.84 974.85,2144.59 974.85,2802
  Top Layer w6.16: 974.85,2802 1008.46,2802 1013.8,2796.65 1015.77,2796.65 1027.46,2784.97 C42.1@1027.46,2783
B15_P_L6: "RGB TFTLCD?.9" U3.33 | length 1827.5
  Top Layer w6.16: U3.33@-95.46,1687.52 -150.31,1687.52 -302.68,1839.9 -302.68,2101.64 -220.64,2183.68 323.42,2183.68 364.61,2224.88 364.61,2802
B15_P_L7: "RGB TFTLCD?.19" U3.51 | length 1530.1
  Top Layer w5.61: 561.46,2749.97 561.46,2802
  Top Layer w6.16: U3.51@-95.46,1864.68 -113.18,1864.68 -120.66,1872.16 -120.83,1872.16 -148,1899.33 -148,1995.6 -54.65,2088.94 -54.32,2088.94 -51.95,2091.31 402.89,2091.31 561.46,2249.89 561.46,2749.97
B15_P_L8: "RGB TFTLCD?.32" U3.44 | length 1480.1
  Top Layer w5.61: U3.44@104.91,1786.32 393.86,1786.32 817.37,2209.82 817.37,2802
B15_P_L9: "RGB TFTLCD?.21" U3.53 | length 1516.2
  Top Layer w5.61: 600.84,2749.97 600.84,2802
  Top Layer w6.16: U3.53@-95.46,1884.37 -113.18,1884.37 -120.66,1891.84 -120.83,1891.84 -135.34,1906.36 -135.34,1993.89 -50.45,2078.78 -50.11,2078.78 -47.74,2081.15 407.1,2081.15 600.84,2274.89 600.84,2749.97
B15_P_L10: "RGB TFTLCD?.16" U3.45 | length 1626.8
  Top Layer w6.16: U3.45@-95.46,1805.63 -98.54,1808.71 -116.43,1808.71 -185.63,1877.91 -185.63,2054.01 -117.28,2122.36 390.83,2122.36 502.41,2233.94 502.41,2802
B15_P_L11: "RGB TFTLCD?.27" U3.52 | length 1335.1
  Top Layer w5.61: U3.52@95.47,1864.68 95.89,1864.26 332.62,1864.26 718.94,2250.59 718.94,2802
B15_P_L12: "RGB TFTLCD?.28" U3.50 | length 1367.7
  Top Layer w5.61: U3.50@95.47,1845 95.89,1844.57 340.77,1844.57 738.63,2242.44 738.63,2802
B15_P_L13: "RGB TFTLCD?.26" U3.54 | length 1302.5
  Top Layer w5.61: 170,1883.94 324.46,1883.94 699.26,2258.74 699.26,2802
  Top Layer w6.16: U3.54@95.47,1884.37 169.58,1884.37 170,1883.94
B15_P_L14: "RGB TFTLCD?.24" U3.58 | length 1237.2
  Top Layer w5.61: 180,1923.31 308.15,1923.31 659.89,2275.05 659.89,2802
  Top Layer w6.16: U3.58@95.47,1923.74 179.58,1923.74 180,1923.31
B15_P_L15: JP2.7 U2.53 | length 2204.5
  Top Layer w6.16: U2.53@1664.54,1884.37 1706.02,1884.37 1726.17,1904.52 v1(1727,1904.52) ; v1(2695.34,2335.66) 2883.07,2523.38 JP2.7@2883.07,2536
  Bottom Layer w6.16: v1(1727,1904.52) 1727.83,1904.52 1870.92,1761.42 1870.92,1754.09 1887.84,1737.17 1887.84,1716.17 1960.9,1643.12 1960.9,1633.5 2084.3,1510.1 2483.79,1510.1 2620.34,1646.66 2620.34,2260.66 v1(2695.34,2335.66)
B15_P_L16: JP2.14 U2.40 | length 1986.7
  Top Layer w6.16: U2.40@1855.47,1746.57 1902.8,1746.57 1908.34,1752.11 1921.57,1752.11 v1(1923.76,1754.3)
  Bottom Layer w6.16: v1(1923.76,1754.3) 1924.84,1753.23 1924.84,1736.23 1935.22,1725.84 1935.22,1697.53 1981.22,1651.53 1981.22,1641.92 2060.13,1563 2414,1563 2598.32,1747.32 2598.32,2291.85 2681.05,2374.58 2899.05,2374.58 2921.65,2351.98 2921.65,2297.42 JP2.14@2983.07,2236
B15_P_L17: JP2.10 U2.44 | length 2069.7
  Top Layer w6.16: U2.44@1855.47,1785.94 1896.94,1785.94 1907,1796 1938,1796 1942,1800 v1(1944.85,1800)
  Bottom Layer w6.16: v1(1944.85,1800) 1972.35,1800 1996.87,1824.52 2095.87,1824.52 2099.58,1820.81 2101.24,1820.81 2111.84,1810.21 2111.84,1758.58 2116.76,1753.66 2116.76,1706.39 2238.62,1584.53 2396.53,1584.53 2578,1766 2578,2381.53 2699.47,2503 2797.85,2503 2803.42,2497.42 2921.65,2497.42 JP2.10@2983.07,2436
B15_P_L18: JP2.11 U2.49 | length 2122
  Top Layer w6.16: U2.49@1664.54,1845 1710.05,1845 1726.17,1861.12 v1(1727,1861.12) ; v1(2726.03,2304.97) 2757.07,2336 JP2.11@2883.07,2336
  Bottom Layer w6.16: v1(1727,1861.12) 1727.83,1861.12 1867.52,1721.42 1867.52,1707.76 1940.58,1634.7 1940.58,1625.08 2098.96,1466.7 2501.77,1466.7 2651.03,1615.97 2651.03,2229.97 v1(2726.03,2304.97)
B15_P_L19: R43.1 SW3.2 U3.22 | length 2079
  Top Layer w6.16: v1(49,1565.6) 52.81,1569.41 U3.22@95.47,1569.41
  Bottom Layer w6.16: R43.1@-369,3013.54 -367.03,3013.54 -267.49,2914 -189,2914 -149.84,2874.84 -149.84,2652.79 -107.37,2610.31 46,2610.31 166.32,2490 166.32,2306.69 39,2179.37 -3.6,2179.37 -132.37,2050.6 -132.37,1748.16 23.56,1592.23 23.56,1590.21 48.17,1565.6 v1(49,1565.6)
  other v1: -373.48,3026.99
B15_P_L20: R45.1 SW5.2 U3.2 | length 2023
  Top Layer w6.16: v1(-7.71,1570.29) -6.29,1570.29 20.32,1543.68 20.32,1417.68 65.44,1372.56 U3.2@95.47,1372.56
  Bottom Layer w6.16: R45.1@-373,2759.54 -361.32,2747.86 -343.54,2747.86 -319.68,2724 -319.68,2693.34 -271.34,2645 -224,2645 -147,2568 46,2568 124,2490 124,2306.69 39,2221.69 -3.6,2221.69 -174.68,2050.6 -174.68,1737.26 v1(-7.71,1570.29)
  other v1: -375.57,2773.56
B15_P_L21: "RGB TFTLCD?.14" U3.41 | length 1698.3
  Top Layer w6.16: U3.41@-95.46,1766.26 -98.54,1769.34 -116.43,1769.34 -225,1877.91 -225,2070.32 -152.64,2142.68 382.42,2142.68 463.04,2223.3 463.04,2802
B15_P_L22: "RGB TFTLCD?.38" U3.32 | length 1675.8
  Top Layer w5.61: U3.32@104.91,1668.2 442.79,1668.2 935.48,2160.9 935.48,2802
B15_P_L23: "RGB TFTLCD?.15" U3.43 | length 1662.6
  Top Layer w6.16: U3.43@-95.46,1785.94 -98.54,1789.02 -116.43,1789.02 -205.32,1877.91 -205.32,2062.17 -134.96,2132.52 386.63,2132.52 482.72,2228.62 482.72,2802
B15_P_L24: "RGB TFTLCD?.31" U3.46 | length 1447.5
  Top Layer w5.61: U3.46@104.91,1806 385.71,1806 797.69,2217.97 797.69,2802
B16_IO0: JP3.36 U4.6 | length 1237
  Top Layer w6.16: JP3.36@-728,-263 -728,-217.55 -679.26,-168.82 -679.26,-15.26 v1(-560,104) ; v1(29,427.73) 29.83,427.73 56.02,453.93 U4.6@95.47,453.93
  Bottom Layer w6.16: v1(-560,104) -559,105 -293.73,105 v1(29,427.73)
B16_IO25: R52.2 U3.15 | length 1472.3
  Top Layer w6.16: v1(-396.08,2357.25) -396.08,2356.6 -478.37,2274.31 -478.37,1867.54 -121.19,1510.35 U3.15@-95.47,1510.35
  Bottom Layer w6.16: v1(-396.08,2357.25) -398.29,2355.04 -398.29,2339.6 -403.38,2334.51 -403.38,2323.93 -380.29,2300.84 -352.79,2300.84 -336.33,2317.3 -293.3,2317.3 -275.46,2299.46 R52.2@-223,2299.46 ; v1@-395.92,2357.09 -379.73,2373.27 -379.73,2375.36 -272.09,2483
B16_N_L1: JP3.32 U4.10 | length 1079.7
  Top Layer w6.16: JP3.32@-728,-63 -728,-19.77 -560.83,147.4 v1(-560,147.4) ; v1(29,471.13) 29.83,471.13 51.99,493.3 U4.10@95.47,493.3
  Bottom Layer w6.16: v1(-560,147.4) -559,148.4 -293.73,148.4 13.07,455.2 13.07,456.03 28.17,471.13 v1(29,471.13)
B16_N_L2: JP3.16 U4.26 | length 1278.6
  Top Layer w6.16: JP3.16@-728,737 -728,691.55 -669.1,632.66 -669.1,429.28 -560.83,321 v1(-560,321) ; v1(29,644.73) 34.77,650.5 56.99,650.5 57.26,650.78 U4.26@95.47,650.78
  Bottom Layer w6.16: v1(-560,321) -553,321 -552,322 -293.73,322 13.07,628.8 13.07,629.63 28.17,644.73 v1(29,644.73)
B16_N_L3: JP3.4 U4.38 | length 1059.3
  Top Layer w6.16: JP3.4@-728,1337 -575,1184 v1(-465,1184) ; v1(29,774.93) 34.77,769.16 56.99,769.16 57.26,768.89 U4.38@95.47,768.89
  Bottom Layer w6.16: v1(-465,1184) -451,1184 -449,1182 -378.07,1182 13.07,790.86 13.07,790.03 28.17,774.93 v1(29,774.93)
B16_N_L4: JP3.28 U4.14 | length 987.8
  Top Layer w6.16: JP3.28@-728,137 -674.2,190.8 v1(-560,190.8) ; v1(29,514.53) 29.83,514.53 47.97,532.67 U4.14@95.47,532.67
  Bottom Layer w6.16: v1(-560,190.8) -559,191.8 -293.73,191.8 13.07,498.6 13.07,499.43 28.17,514.53 v1(29,514.53)
B16_N_L5: JP3.22 U4.20 | length 1046.2
  Top Layer w6.16: JP3.22@-728,437 -728,423.07 -560.83,255.9 v1(-560,255.9) ; v1(29,579.63) 34.77,585.4 50.94,585.4 57.26,591.72 U4.20@95.47,591.72
  Bottom Layer w6.16: v1(-560,255.9) -553,255.9 -552,256.9 -293.73,256.9 13.07,563.7 13.07,564.53 28.17,579.63 v1(29,579.63)
B16_N_L6: JP3.24 U4.18 | length 1006.5
  Top Layer w6.16: JP3.24@-728,337 -625.2,234.2 v1(-560,234.2) ; v1(29,557.93) 29.83,557.93 43.94,572.04 U4.18@95.47,572.04
  Bottom Layer w6.16: v1(-560,234.2) -559,235.2 -293.73,235.2 13.07,542 13.07,542.83 28.17,557.93 v1(29,557.93)
B16_N_L7: JP1.28 U4.42 | length 1153.1
  Top Layer w6.16: JP1.28@-728,1537 -728,1491.55 -592.95,1356.5 -592.95,1355.35 v1(-465,1227.4) ; v1(29,818.33) 34.77,812.56 52.96,812.56 57.26,808.26 U4.42@95.47,808.26
  Bottom Layer w6.16: v1(-465,1227.4) -451,1227.4 -449,1225.4 -378.07,1225.4 13.07,834.26 13.07,833.43 28.17,818.33 v1(29,818.33)
B16_N_L8: JP3.10 U4.32 | length 1027.3
  Top Layer w6.16: JP3.10@-728,1037 -546.9,1037 v1(-465,1118.9) ; v1(29,709.83) U4.32@95.47,709.83
  Bottom Layer w6.16: v1(-465,1118.9) -451,1118.9 -449,1116.9 -378.07,1116.9 13.07,725.76 13.07,724.93 28.17,709.83 v1(29,709.83)
B16_N_L9: JP1.17 U4.53 | length 1669.2
  Top Layer w6.16: v1(-542,946.53) -541.17,946.53 -521.01,926.37 U4.53@-95.46,926.37
  Bottom Layer w6.16: JP1.17@-828,2037 -828,1991.55 -786.9,1950.45 -786.9,1912.6 -779.26,1904.97 -779.26,1804.97 -766.58,1792.28 -766.58,1721.02 -721.13,1675.58 -712.02,1675.58 -597.98,1561.54 -597.98,1002.5 v1(-542,946.53)
B16_N_L10: JP1.21 U4.49 | length 1511.4
  Top Layer w6.16: v1(-542,903.13) -541.18,903.13 -525.05,887 U4.49@-95.46,887
  Bottom Layer w6.16: JP1.21@-828,1837 -828,1791.55 -789.42,1752.98 -789.42,1700.76 -779.26,1690.6 -779.26,1604.97 -766.58,1592.28 -766.58,1521.02 -721.13,1475.58 -712.02,1475.58 -618.3,1381.86 -618.3,978.59 -542.84,903.13 v1(-542,903.13)
B16_N_L11: JP1.20 U4.50 | length 1468.6
  Top Layer w6.16: JP1.20@-728,1937 -646,1855 -646,1497.04 v1(-464.59,1315.63) ; v1(29,905.13) 29.83,905.13 47.96,887 U4.50@95.47,887
  Bottom Layer w6.16: v1(-464.59,1315.63) -464.24,1315.28 -446.5,1315.28 -443.42,1312.2 -378.07,1312.2 13.07,921.06 13.07,920.23 28.17,905.13 v1(29,905.13)
B16_N_L12: JP1.24 U4.46 | length 1311.3
  Top Layer w6.16: JP1.24@-728,1737 -671,1680 -671,1476.98 -465.86,1271.84 v1(-464.38,1271.84) ; v1(29,861.73) 29.83,861.73 43.93,847.63 U4.46@95.47,847.63
  Bottom Layer w6.16: v1(-464.38,1271.84) -446.25,1271.84 -443.21,1268.8 -378.07,1268.8 13.07,877.66 13.07,876.83 28.17,861.73 v1(29,861.73)
B16_N_L13: JP1.16 U4.54 | length 1625.4
  Top Layer w6.16: JP1.16@-728,2137 -599,2008 -599,1495.1 v1(-464.28,1360.38) ; v1(29,948.53) 29.83,948.53 51.99,926.37 U4.54@95.47,926.37
  Bottom Layer w6.16: v1(-464.28,1360.38) -462.07,1358.17 -446.4,1358.17 -443.83,1355.6 -383.34,1355.6 8.63,963.63 13.07,963.63 28.17,948.53 v1(29,948.53)
B16_N_L14: JP3.14 U4.28 | length 1356.1
  Top Layer w6.16: JP3.14@-728,837 -728,791.55 -658.94,722.5 -658.94,440.82 -560.83,342.7 v1(-560,342.7) ; v1(29,666.43) 33.03,670.46 U4.28@95.47,670.46
  Bottom Layer w6.16: v1(-560,342.7) -553,342.7 -552,343.7 -293.73,343.7 13.07,650.5 13.07,651.33 28.17,666.43 v1(29,666.43)
B16_N_L15: JP1.15 U4.57 | length 1730.3
  Top Layer w6.16: v1(-542,985.89) -521.85,965.74 U4.57@-95.46,965.74
  Bottom Layer w6.16: JP1.15@-828,2137 -828,2091.55 -776.74,2040.29 -776.74,1916.81 -766.58,1906.65 -766.58,1821.02 -721.13,1775.58 -712.02,1775.58 -587.82,1651.38 -587.82,1030.88 -542.83,985.89 v1(-542,985.89)
B16_N_L16: Q1.2 R21.2 U3.7 | length 2777.9
  Top Layer w6.16: U3.7@-95.47,1431.61 -32.11,1431.61 49.19,1350.32 572.16,1350.32 1521.27,2299.43 v1(1521.27,2300.86) ; v1(1461,2866.54) 1461,2821 1526,2756 v1(1527.88,2756)
  Bottom Layer w6.16: Q1.2@1458,2918 1458,2869.54 v1(1461,2866.54) ; v1(1521.27,2300.86) 1565.96,2345.55 1574.97,2345.55 1621.69,2392.27 1621.69,2583.15 1531.63,2673.21 1531.63,2734.83 1528.55,2737.91 1528.55,2755.33 v1(1527.88,2756)